# EAGLE board combo_lock (EAGLE 9.6.2)
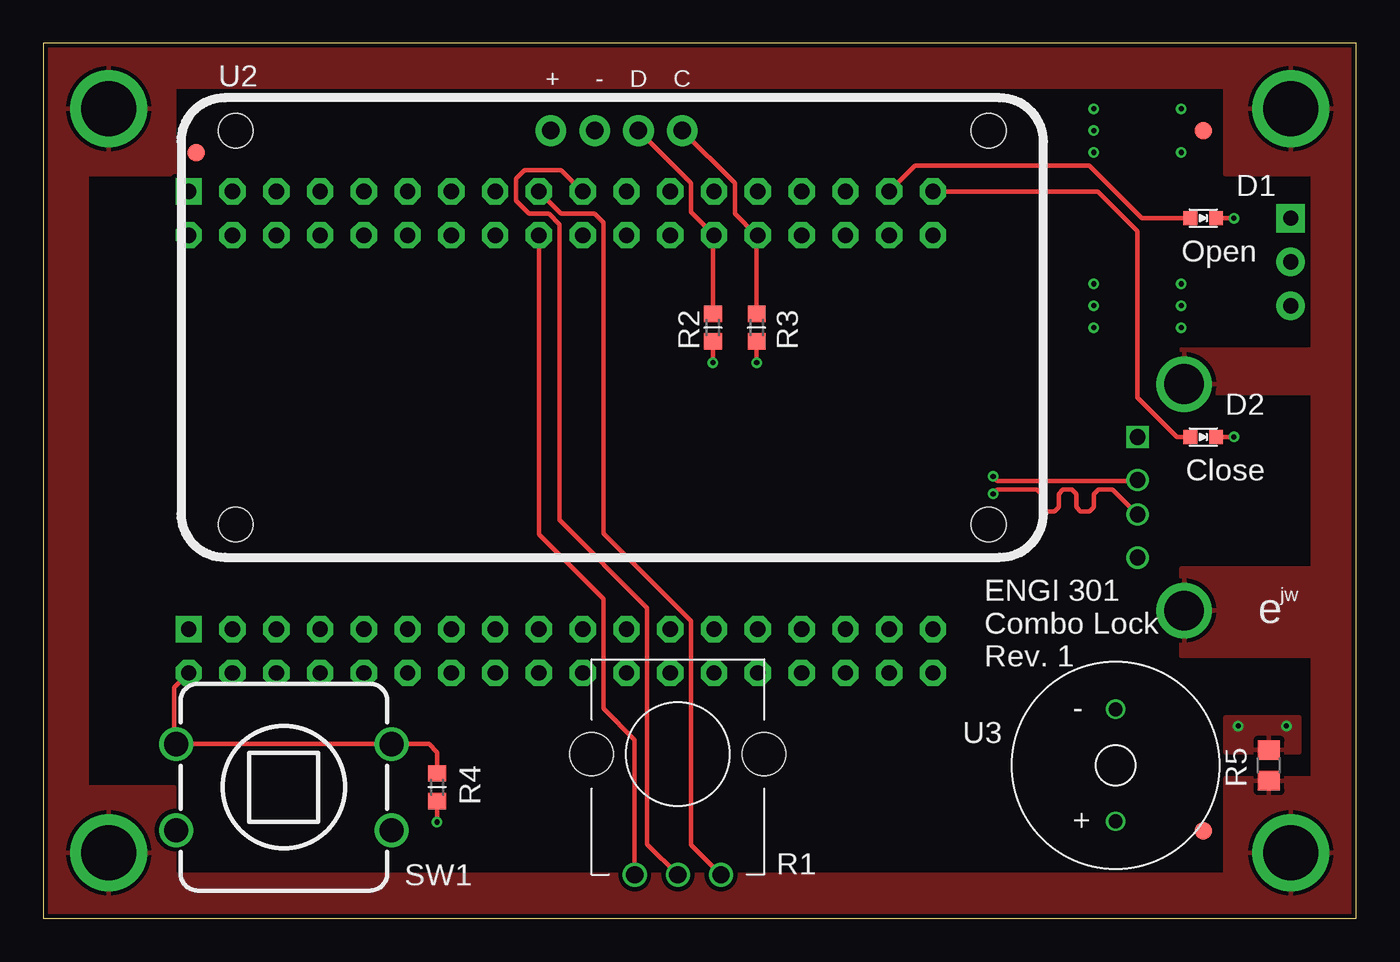
[diagram p0: board, top side]
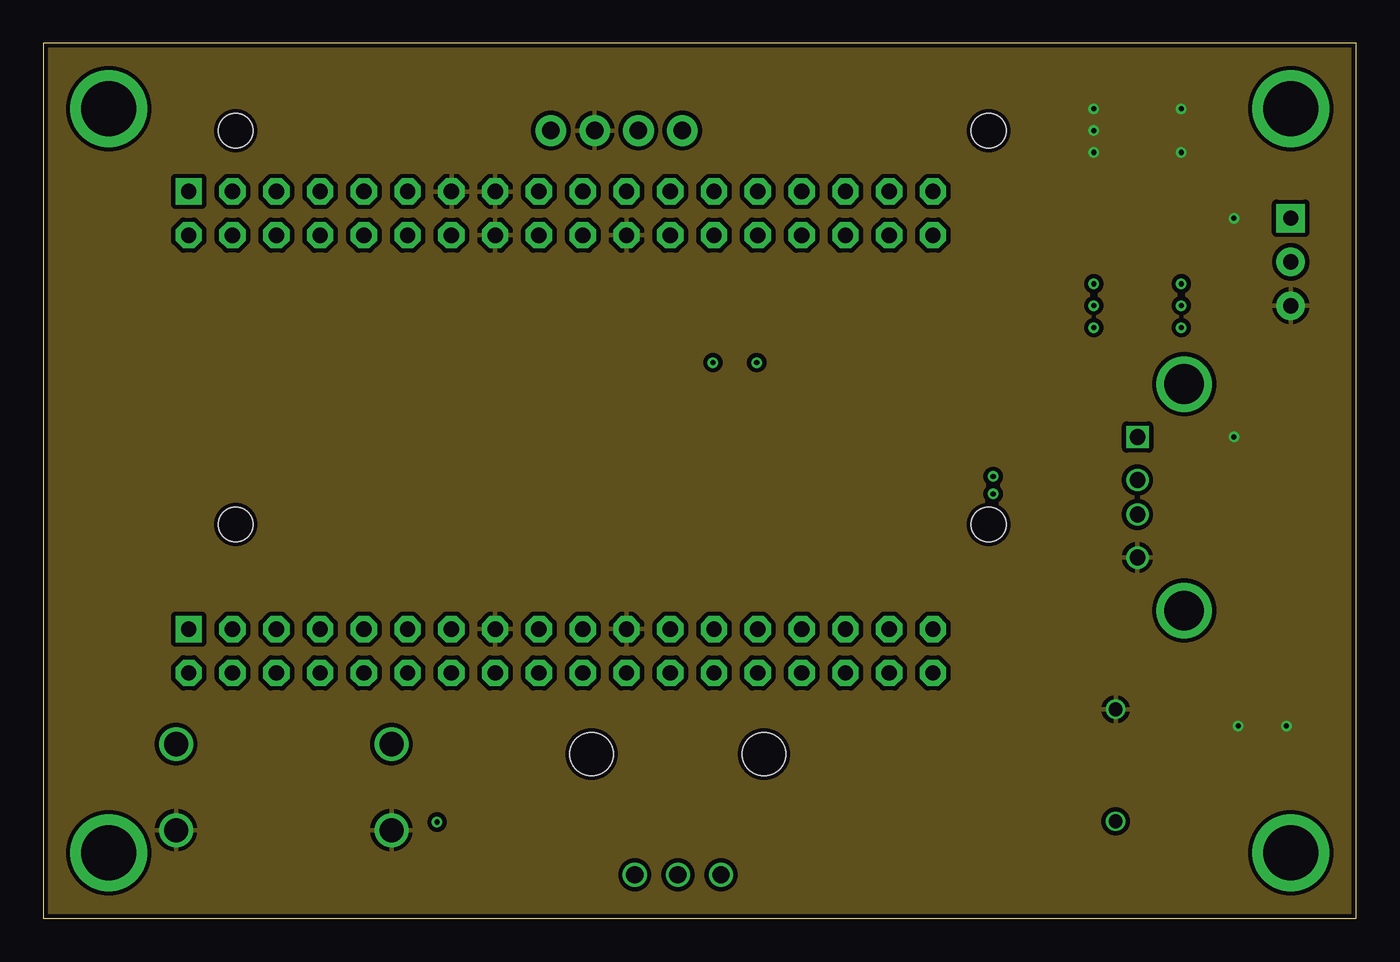
[diagram p1: board, inner layer Route2]
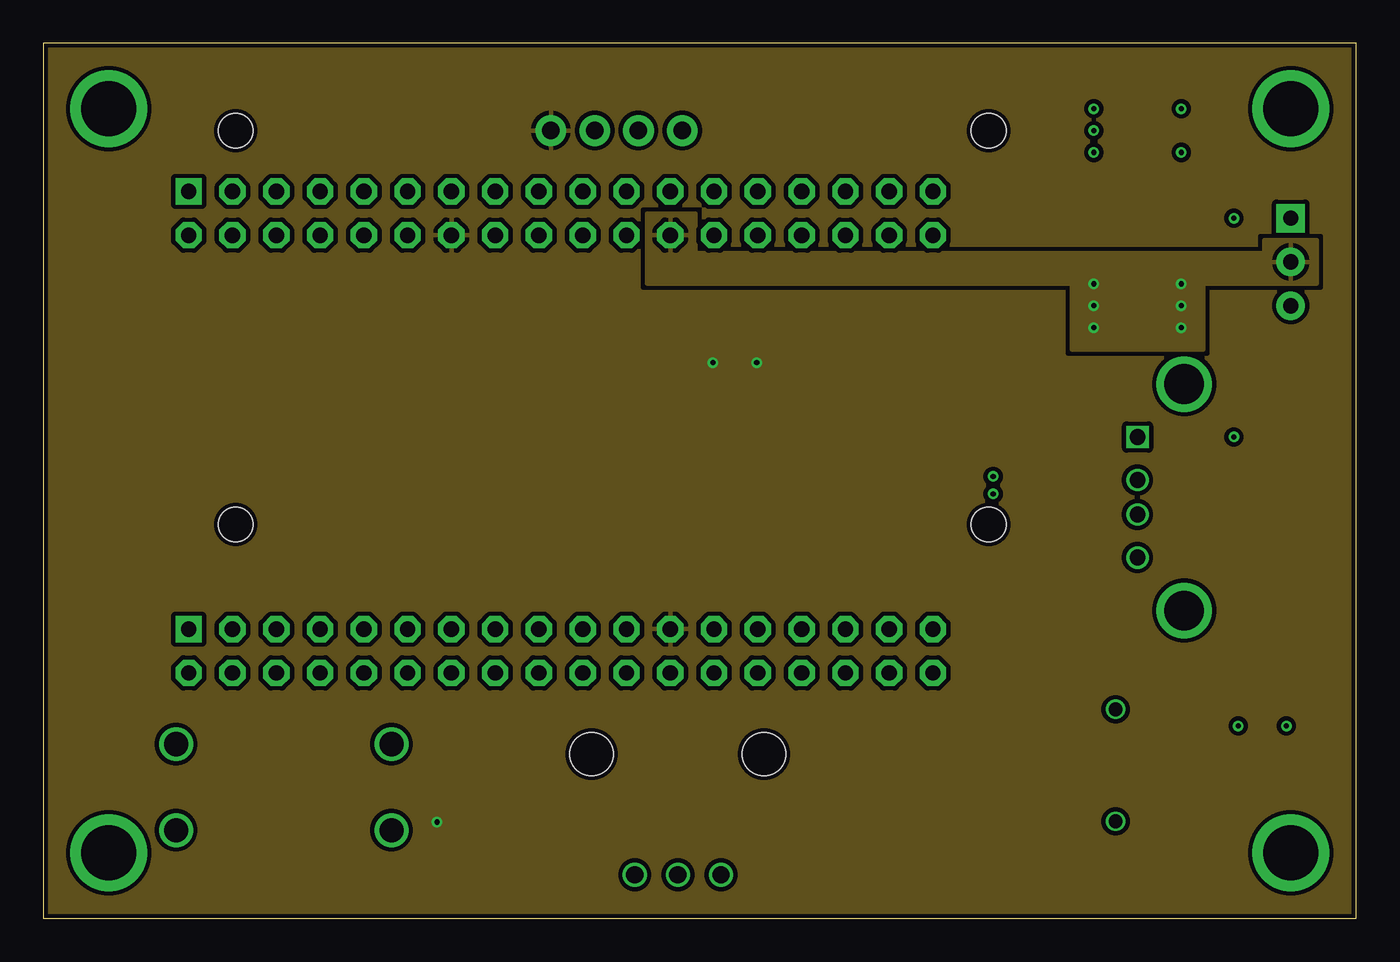
[diagram p2: board, inner layer Route15]
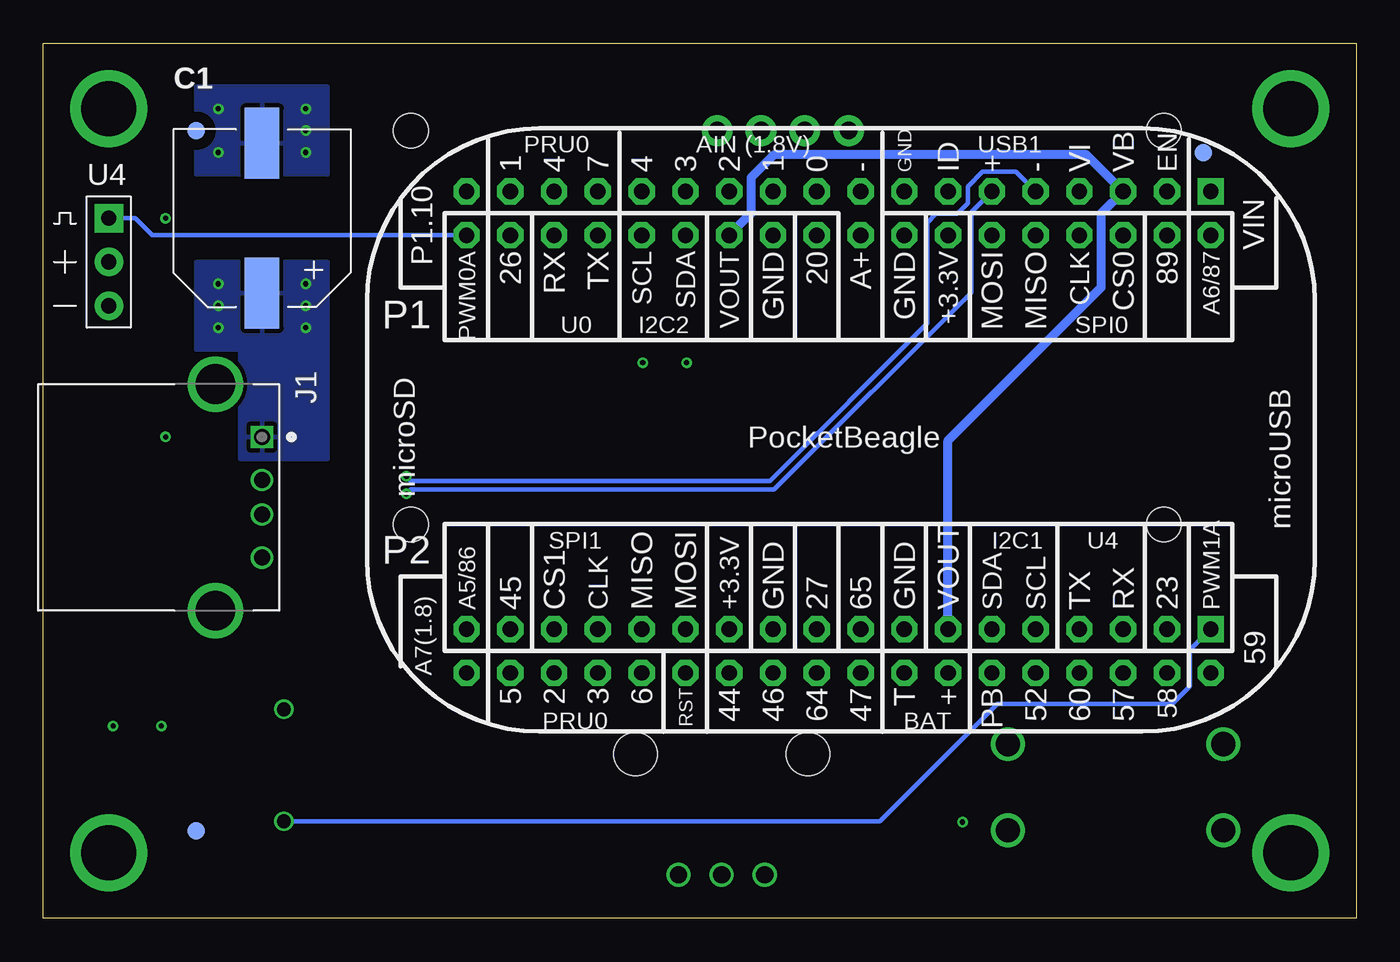
[diagram p3: board, bottom side, seen from below]

Size 76.2 x 50.8 mm. Coordinates in mm from the lower left corner, seen from the top.
Outline: 0,0 76.2,0 76.2,50.8 0,50.8 0,0
Copper layers (1*2*15*16): Top 0.035mm / dielectric 0.23mm / Route2 0.035mm / dielectric 0.93mm / Route15 0.035mm / dielectric 0.23mm / Bottom 0.035mm
Design rules "ENGI301_4lyr": minimum track width 10mil, minimum drill 12mil, track to track 10mil, track to pad 10mil, pad to pad 10mil, via to via 10mil, smd to smd 10mil, copper to edge 10mil, drill to drill 12mil, minimum pad ring 6mil, minimum via ring 6mil, stop-mask expansion 3mil, vias tented up to drill 25mil, thermal gap 10mil

## Footprints (pad centres in the part's own frame; a part is rotated, then mirrored left to right if it is on the bottom)
CP10MM = smd 2 x 4.1: P$1 0,-4.35; P$2 0,4.35
EIA-STD = smd 0.8 x 0.8: ANODE -0.75,0; CATHODE 0.75,0
FIDUCIAL_40MIL = smd 1.016 x 1.016: P$1 0,0
TE_292303-1 = drill 0.92 square: 1 0,0 | drill 0.92: 2 2.5,0; 3 4.5,0; 4 7,0 | drill 2.3: SH1 -3.07,-2.71; SH2 10.07,-2.71
MOUNTING_HOLE = drill 3.175 pad 4.445: P$1 0,0
POT-PO90S = drill 1: CCW -2.5,0; CW 2.5,0; S 0,0 | hole 2.5: -5,7; 5,7
R0603 = smd 0.95 x 1.031: 1 -0.8,0; 2 0.8,0
R0805 = smd 1.143 x 1.27: 1 -0.889,0; 2 0.889,0
BUTTON_12.5MM = drill 1.4: 1 -6.25,2.5; 2 -6.25,-2.5; 3 6.25,2.5; 4 6.25,-2.5
POCKETBEAGLE = drill 0.889 pad 1.524 square: P1_01 5.91,3.53; P2_01 5.91,28.93 | drill 0.889 pad 1.524 octagon: P1_02 5.91,6.07; P1_03 8.45,3.53; P1_04 8.45,6.07; P1_05 10.99,3.53; P1_06 10.99,6.07; P1_07 13.53,3.53; P1_08 13.53,6.07; P1_09 16.07,3.53; P1_10 16.07,6.07; P1_11 18.61,3.53; P1_12 18.61,6.07; P1_13 21.15,3.53; P1_14 21.15,6.07; P1_15 23.69,3.53; P1_16 23.69,6.07; P1_17 26.23,3.53; P1_18 26.23,6.07; P1_19 28.77,3.53; P1_20 28.77,6.07; P1_21 31.31,3.53; P1_22 31.31,6.07; P1_23 33.85,3.53; P1_24 33.85,6.07; P1_25 36.39,3.53; P1_26 36.39,6.07; P1_27 38.93,3.53; P1_28 38.93,6.07; P1_29 41.47,3.53; P1_30 41.47,6.07; P1_31 44.01,3.53; P1_32 44.01,6.07; P1_33 46.55,3.53; P1_34 46.55,6.07; P1_35 49.09,3.53; P1_36 49.09,6.07; P2_02 5.91,31.47; P2_03 8.45,28.93; P2_04 8.45,31.47; P2_05 10.99,28.93; P2_06 10.99,31.47; P2_07 13.53,28.93; P2_08 13.53,31.47; P2_09 16.07,28.93; P2_10 16.07,31.47; P2_11 18.61,28.93; P2_12 18.61,31.47; P2_13 21.15,28.93; P2_14 21.15,31.47; P2_15 23.69,28.93; P2_16 23.69,31.47; P2_17 26.23,28.93; P2_18 26.23,31.47; P2_19 28.77,28.93; P2_20 28.77,31.47; P2_21 31.31,28.93; P2_22 31.31,31.47; P2_23 33.85,28.93; P2_24 33.85,31.47; P2_25 36.39,28.93; P2_26 36.39,31.47; P2_27 38.93,28.93; P2_28 38.93,31.47; P2_29 41.47,28.93; P2_30 41.47,31.47; P2_31 44.01,28.93; P2_32 44.01,31.47; P2_33 46.55,28.93; P2_34 46.55,31.47; P2_35 49.09,28.93; P2_36 49.09,31.47
0.56_HEX_BACKPACK = drill 1.016 pad 1.778: GND -1.016,11.43; SCL 4.064,11.43; SDA 1.524,11.43; VCC -3.556,11.43 | hole 2: -21.844,-11.43; 21.844,-11.43; -21.844,11.43; 21.844,11.43
BUZZER_6.5MM = drill 0.8: + 0,-3.25; - 0,3.25
SERVO-X1 = drill 0.889 pad 1.651: GND 0,-2.54; PWR 0,0 | drill 0.889 pad 1.651 square: SIG 0,2.54

## Placement (x,y rotation side)
C1  220uF  [CP10MM]  63.5,40.64 0 bottom
D1  GRN LED  [EIA-STD]  67.31,40.64 0 top
D2  RED LED  [EIA-STD]  67.31,27.94 0 top
FUD1  FIDUCIAL  [FIDUCIAL_40MIL]  67.31,45.72 0 top
FUD2  FIDUCIAL  [FIDUCIAL_40MIL]  67.31,5.08 0 top
FUD3  FIDUCIAL  [FIDUCIAL_40MIL]  8.89,44.45 0 bottom
FUD4  FIDUCIAL  [FIDUCIAL_40MIL]  67.31,45.72 0 bottom
FUD5  FIDUCIAL  [FIDUCIAL_40MIL]  67.31,5.08 0 bottom
FUD6  FIDUCIAL  [FIDUCIAL_40MIL]  8.89,44.45 0 top
J1  292303-1  [TE_292303-1]  63.5,27.94 270 bottom
MGT1  MOUNTING_HOLE  [MOUNTING_HOLE]  3.81,46.99 0 top
MGT2  MOUNTING_HOLE  [MOUNTING_HOLE]  3.81,3.81 0 top
MGT3  MOUNTING_HOLE  [MOUNTING_HOLE]  72.39,3.81 0 top
MGT4  MOUNTING_HOLE  [MOUNTING_HOLE]  72.39,46.99 0 top
R1  POTENTIOMETER  [POT-PO90S]  36.83,2.54 0 top
R2  1k  [R0603]  38.86,34.29 270 top
R3  1k  [R0603]  41.4,34.29 270 top
R4  1k  [R0603]  22.86,7.62 270 top
R5  0.1  [R0805]  71.12,8.89 90 top
SW1  PUSH_BUTTON  [BUTTON_12.5MM]  13.97,7.62 0 top
U1  POCKETBEAGLE  [POCKETBEAGLE]  2.54,45.72 180 bottom
U2  0.56_HEX_BACKPACK  [0.56_HEX_BACKPACK]  33.02,34.29 0 top
U3  BUZZER  [BUZZER_6.5MM]  62.23,8.89 0 top
U4  SERVO_SG90  [SERVO-X1]  72.39,38.1 0 bottom

## Library data of the parts
C1 = combo_lock; POPULATE: 1
D1 D2 FUD1-FUD6 MGT1-MGT4 R1-R5 SW1 U1-U4 = combo_lock
J1 = combo_lock; AVAILABILITY: In Stock; CENTERLINE_PITCH: 2 mm[.078 in]; COMMENT: 292303-1; DESCRIPTION: Conn; Data; USB; Recept; 2.0; 4 Pos; 1 Port; Rt Angle; A Ser; Tin over Copper; EU_ROHS_COMPLIANCE: Compliant; MF: TE Connectivity; MP: 292303-1; NUMBER_OF_POSITIONS: 4; PACKAGE: None; PRICE: None; PRODUCT_TYPE: Connector; PURCHASE-URL: https://pricing.snapeda.com/search/part/292303-1/?ref=eda

## Nets
AGND: R1.CW U1.P1_17
BAT.VIN: U1.P2_14
BUTTON: R4.1 SW1.1 SW1.3 U1.P2_02
BUZZER: U1.P2_01 U3.+
CGND: J1.SH1 J1.SH2 MGT1.P$1 MGT2.P$1 MGT3.P$1 MGT4.P$1 R5.1
GND: C1.P$2 D1.CATHODE D2.CATHODE J1.4 R5.2 SW1.2 SW1.4 U1.P1_13 U1.P1_15 U1.P1_16 U1.P1_22 U1.P2_15 U1.P2_21 U2.GND U3.- U4.GND
GREEN_LED: D1.ANODE U1.P1_33
I2C2_SCL: R3.1 U1.P1_28 U2.SCL
I2C2_SDA: R2.1 U1.P1_26 U2.SDA
POTENTIOMETER: R1.S U1.P1_19
RED_LED: D2.ANODE U1.P1_35
SERVO: U1.P1_36 U4.SIG
USB1_DM: J1.2 U1.P1_09
USB1_DP: J1.3 U1.P1_11
VDD_1P8V: R1.CCW U1.P1_18
VDD_3P3V: R2.2 R3.2 R4.2 U1.P1_14 U1.P2_23 U2.VCC
VDD_5V: C1.P$1 J1.1 U1.P1_05 U1.P1_24 U1.P2_13 U4.PWR
VIN: U1.P1_01

## Tracks (layer width: path | path; a pad name or v marks a point on that pad's centre or on a via)
AGND
  Top 0.254: U1.P1_17 30.07,40.89 32,40.89 32.51,40.39 32.51,22.35 37.59,17.27 37.59,4.28 R1.CW
BUTTON
  Top 0.254: R4.1 22.86,9.65 22.39,10.12 SW1.3 SW1.1 7.62,10.22 7.62,13.42 U1.P2_02
BUZZER
  Bottom 0.254: U3.+ 27.63,5.64 20.83,12.45 10.67,12.45 9.65,13.46 9.65,15.59 U1.P2_01
CGND
  pour Top: -2.54,-2.54 -2.54,25.4 2.54,25.4 2.54,7.62 7.62,7.62 7.62,2.54 68.58,2.54 68.58,8.13 73.66,8.13 73.66,15.24 66.04,15.24 66.04,20.32 72.39,20.32 73.66,20.32 73.66,21.59 73.66,25.4 78.74,25.4 78.74,-2.54
  pour Top: -2.54,25.4 -2.54,53.34 78.74,53.34 78.74,25.4 73.66,25.4 73.66,30.48 66.04,30.48 66.04,33.02 73.66,33.02 73.66,43.18 68.58,43.18 68.58,48.26 7.62,48.26 7.62,43.18 2.54,43.18 2.54,25.4
GND  (via drill 0.3 pad 0.61)
  Top 0.254: D2.CATHODE v69.09,27.94 | D1.CATHODE v69.09,40.64
  other vias: 69.34,11.18 72.14,11.18 60.96,46.99 60.96,45.72 60.96,44.45 66.04,44.45 66.04,46.99
  pour Route2: -5.08,55.88 78.74,55.88 81.28,55.88 81.28,-5.08 -5.08,-5.08
  pour Top: 68.58,9.65 72.9,9.65 72.9,11.68 68.58,11.68
  pour Bottom: 59.69,43.18 59.69,48.26 67.31,48.26 67.31,43.18
GREEN_LED
  Top 0.254: U1.P1_33 50.59,43.69 60.71,43.69 63.75,40.64 D1.ANODE
I2C2_SCL
  Top 0.254: U2.SCL 40.13,42.67 40.13,40.89 41.38,39.65 U1.P1_28 41.4,39.58 R3.1
I2C2_SDA
  Top 0.254: U2.SDA 37.59,42.67 37.59,40.99 38.78,39.8 38.86,39.72 | 38.86,39.72 U1.P1_26 | R2.1 38.86,39.72
POTENTIOMETER
  Top 0.254: U1.P1_19 30.07,43.43 27.94,43.43 27.43,42.93 27.43,41.66 28.19,40.89 29.35,40.89 29.97,40.27 29.97,23.11 35.05,18.03 35.05,4.32 R1.S
RED_LED
  Top 0.254: U1.P1_35 61.19,42.19 63.5,39.88 63.5,30.23 65.79,27.94 D2.ANODE
SERVO
  Bottom 0.254: U1.P1_36 69.88,39.65 70.87,40.64 U4.SIG
USB1_DM  (via drill 0.3 pad 0.61)
  Top 0.254: v55.12,25.65 55.37,25.4 63.46,25.4 J1.2
  Bottom 0.254: U1.P1_09 19.75,43.33 21.69,43.33 22.55,42.48 22.55,41.51 23.16,40.89 24.38,40.89 24.89,40.39 24.89,34.54 34.04,25.4 54.86,25.4 v55.12,25.65
USB1_DP  (via drill 0.3 pad 0.61)
  Top 0.254: v55.12,24.64 55.37,24.89 57.66,24.89 57.91,24.64 57.91,23.88 58.17,23.62 58.67,23.62 58.93,23.88 58.93,24.64 59.18,24.89 59.69,24.89 59.94,24.64 59.94,23.88 60.2,23.62 60.71,23.62 60.96,23.88 60.96,24.64 61.21,24.89 62.05,24.89 J1.3
  Bottom 0.254: U1.P1_11 22.35,40.99 22.35,36.32 33.78,24.89 54.86,24.89 v55.12,24.64
VDD_1P8V
  Top 0.254: U1.P1_18 28.77,22.28 32.51,18.54 32.51,12.19 34.33,10.37 R1.CCW
VDD_3P3V  (via drill 0.3 pad 0.61)
  Top 0.254: R4.2 v22.86,5.59 | R3.2 v41.4,32.26 | R2.2 v38.86,32.26
  pour Route15 (rank 6): -7.62,58.42 83.82,58.42 83.82,-7.62 -7.62,-7.62
VDD_5V  (via drill 0.3 pad 0.61)
  Bottom 0.508: U1.P2_13 23.69,27.75 14.8,36.63 14.8,40.92 U1.P1_05 15.66,44.32 33.78,44.32 35.12,42.98 35.12,40.92 U1.P1_24
  other vias: 60.96,36.83 66.04,36.83 66.04,35.56 66.04,34.29 60.96,35.56 60.96,34.29
  pour Route15: 35.05,40.89 35.05,36.83 59.69,36.83 59.69,33.02 67.31,33.02 67.31,36.83 73.91,36.83 73.91,39.37 70.87,39.37 70.87,38.61 37.85,38.61 37.85,40.89
  pour Bottom: 59.69,26.67 59.69,38.1 67.31,38.1 67.31,33.02 64.77,33.02 64.77,26.67

## Text on the board
tPlace: Open | Close | jw | ENGI 301 / Combo Lock | e | Rev. 1